# Altium PCB PCB_10 Channel LEDs.PcbDoc
Units mm, origin at the board's own origin, x right, y up, seen from the top; angles counter-clockwise.
Board outline 50.04 x 100.08 mm, 2 copper layers (Top Layer, Bottom Layer); 21 components, 21 nets, 51 pads, 0 vias.
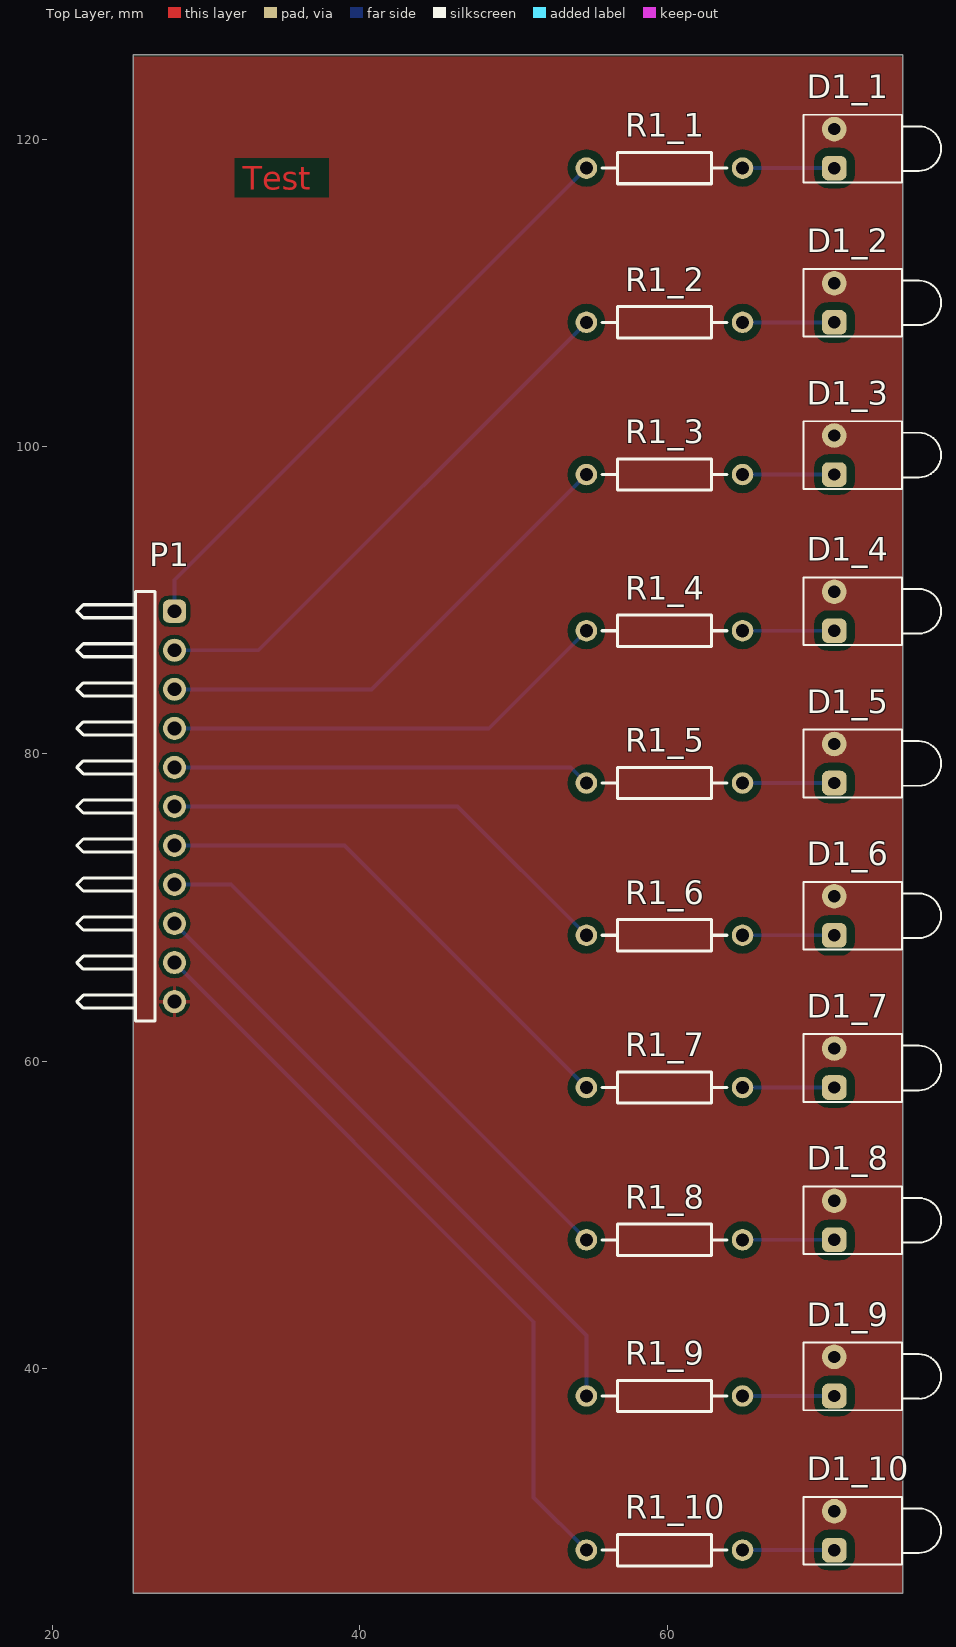
[diagram p0: Top Layer view]
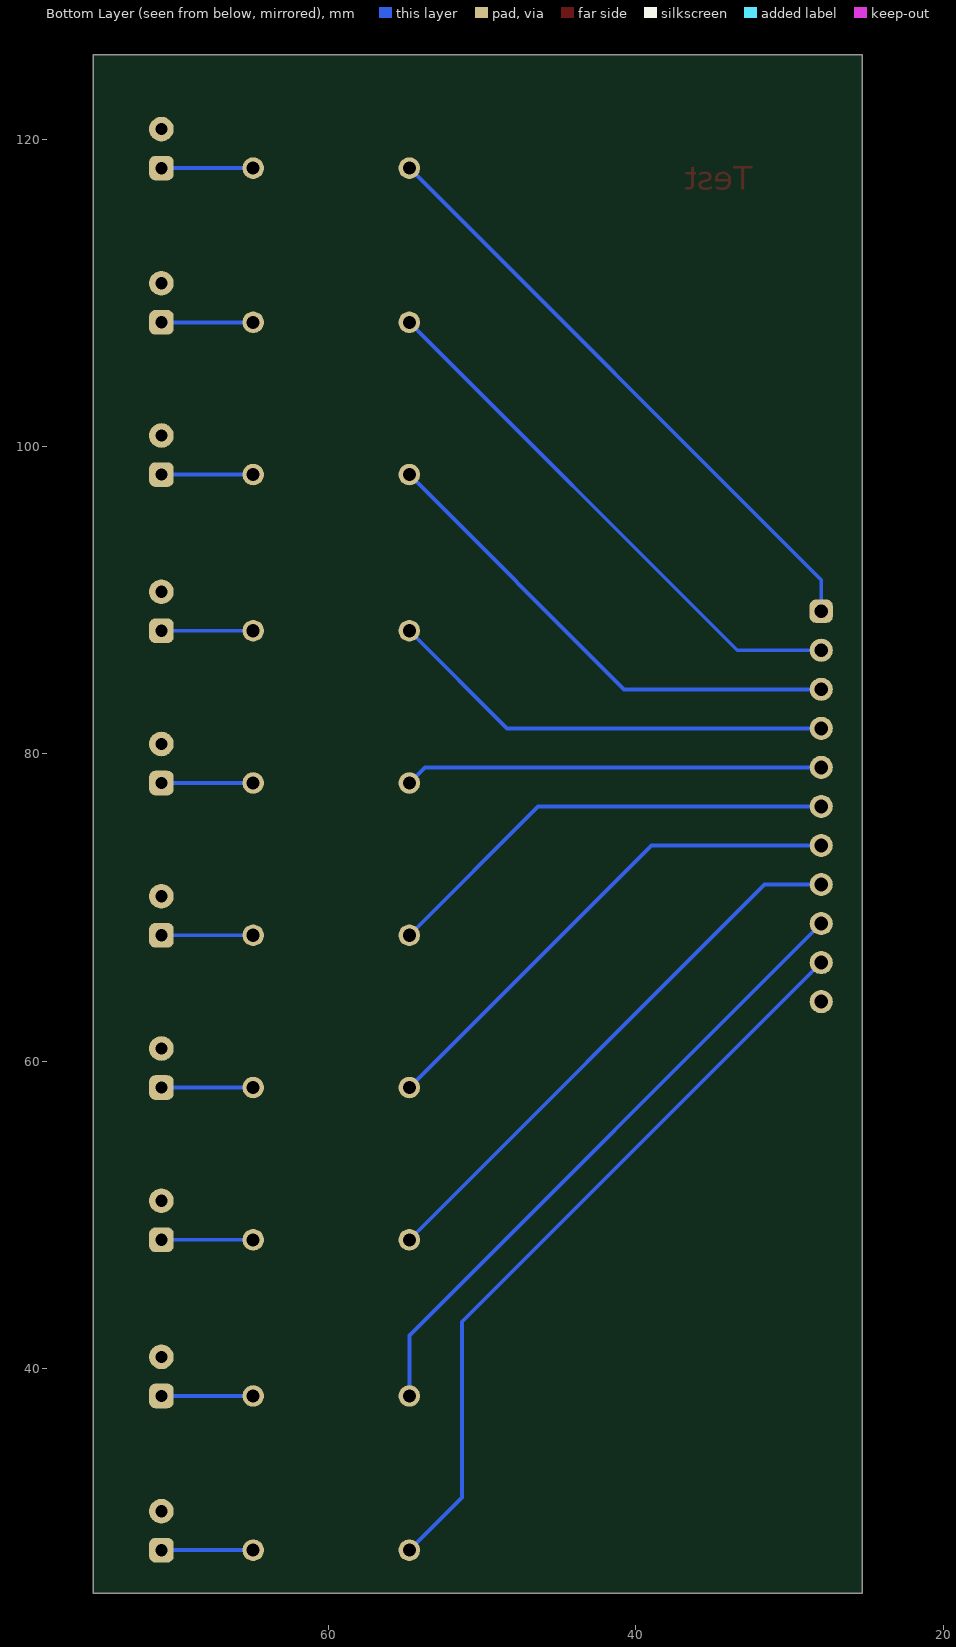
[diagram p1: Bottom Layer view, seen from below]

## Layer stack, top to bottom
Top Solder: solder mask 0.0102, Solder Resist, Dk 3.5
Top Layer: signal copper 0.0356
Dielectric 1: dielectric 0.32, FR-4, Dk 4.8
Bottom Layer: signal copper 0.0356
Bottom Solder: solder mask 0.0102, Solder Resist, Dk 3.5

## Board outline
25.273,25.4 25.273,125.476 75.311,125.476 75.311,25.4

## Design rules (kind name [scope] priority, off if disabled: settings)
Clearance Test [InPoly vs OnLayer('Keep-Out Layer')] p1: gap=2
Clearance "0,5mm to R pads" [InComponentClass('Ballast Rs') vs InNamedPolygon('Top +12V')] p2: gap=0.508
Clearance "0,5mm to LED pad" [InComponentClass('LEDs') vs InNet('+12V')] p3: gap=0.508
Clearance [All] p4: gap=0.254
PolygonConnect "Direct for LEDs" [InComponentClass('LEDs') vs InNet('+12V')] p1: connectstyle=Direct reliefconductorwidth=0.254 reliefentries=4 polygonreliefangle="90 Angle" airgapwidth=0.254
PolygonConnect [All] p2: connectstyle=Relief reliefconductorwidth=0.254 reliefentries=4 polygonreliefangle="90 Angle" airgapwidth=0.254
RoomDefinition Con [InComponentClass('Con')] p1: confinementstyle=ConfineIn formatcopy=TRUE lockcomponents=FALSE outline 20.955,60.452 30.734,60.452 30.734,94.488 20.955,94.488
RoomDefinition Ch10 [InComponentClass('Ch10')] p2: confinementstyle=ConfineIn formatcopy=TRUE lockcomponents=FALSE outline 53.34,26.543 78.486,26.543 78.486,35.306 53.34,35.306
RoomDefinition Ch9 [InComponentClass('Ch9')] p3: confinementstyle=ConfineIn formatcopy=TRUE lockcomponents=FALSE outline 53.34,36.576 78.486,36.576 78.486,45.339 53.34,45.339
RoomDefinition Ch8 [InComponentClass('Ch8')] p4: confinementstyle=ConfineIn formatcopy=TRUE lockcomponents=FALSE outline 53.34,46.736 78.486,46.736 78.486,55.499 53.34,55.499
RoomDefinition Ch7 [InComponentClass('Ch7')] p5: confinementstyle=ConfineIn formatcopy=TRUE lockcomponents=FALSE outline 53.34,56.642 78.486,56.642 78.486,65.405 53.34,65.405
RoomDefinition Ch6 [InComponentClass('Ch6')] p6: confinementstyle=ConfineIn formatcopy=TRUE lockcomponents=FALSE outline 53.34,66.548 78.486,66.548 78.486,75.311 53.34,75.311
RoomDefinition Ch5 [InComponentClass('Ch5')] p7: confinementstyle=ConfineIn formatcopy=TRUE lockcomponents=FALSE outline 53.34,76.454 78.486,76.454 78.486,85.217 53.34,85.217
RoomDefinition Ch4 [InComponentClass('Ch4')] p8: confinementstyle=ConfineIn formatcopy=TRUE lockcomponents=FALSE outline 53.34,86.36 78.486,86.36 78.486,95.123 53.34,95.123
RoomDefinition Ch3 [InComponentClass('Ch3')] p9: confinementstyle=ConfineIn formatcopy=TRUE lockcomponents=FALSE outline 53.34,96.52 78.486,96.52 78.486,105.283 53.34,105.283
RoomDefinition Ch2 [InComponentClass('Ch2')] p10: confinementstyle=ConfineIn formatcopy=TRUE lockcomponents=FALSE outline 53.34,106.426 78.486,106.426 78.486,115.189 53.34,115.189
RoomDefinition Ch1 [InComponentClass('Ch1')] p11: confinementstyle=ConfineIn formatcopy=TRUE lockcomponents=FALSE outline 53.34,116.459 78.486,116.459 78.486,125.222 53.34,125.222
RoutingVias [All] p1: holewidth=0.711 width=1.27 viastyle="Through Hole" minholewidth=0.711 minwidth=1.27 maxholewidth=0.711 maxwidth=1.27
SolderMaskExpansion [All] p1: expansion=0.102
UnpouredPolygon [All] p1: allowunpoured=FALSE
Width [All] p1: maxlimit=0.254 minlimit=0.254 preferedwidth=0.254
29 further rules are at their usual default settings.

## Classes and differential pairs
component class Ch1: D1_1 R1_1
component class Ch2: D1_2 R1_2
component class Ch3: D1_3 R1_3
component class Ch4: D1_4 R1_4
component class Ch5: D1_5 R1_5
component class Ch6: D1_6 R1_6
component class Ch7: D1_7 R1_7
component class Ch8: D1_8 R1_8
component class Ch9: D1_9 R1_9
component class Ch10: D1_10 R1_10
component class Con: P1
net class CAT[1..10]: CAT1 CAT2 CAT3 CAT4 CAT5 CAT6 CAT7 CAT8 CAT9 CAT10
channel class "LED Channels": Ch1 Ch2 Ch3 Ch4 Ch5 Ch6 Ch7 Ch8 Ch9 Ch10

## Components (designator, comment, footprint, x,y, rotation, side; value= is the part's Value field where it differs from the comment)
D1_1 "LED1" LED-1 70.866,119.38 r0 top (schematic designator D1)
D1_2 "LED1" LED-1 70.866,109.347 r0 top (schematic designator D1)
D1_3 "LED1" LED-1 70.866,99.441 r0 top (schematic designator D1)
D1_4 "LED1" LED-1 70.866,89.281 r0 top (schematic designator D1)
D1_5 "LED1" LED-1 70.866,79.375 r0 top (schematic designator D1)
D1_6 "LED1" LED-1 70.866,69.469 r0 top (schematic designator D1)
D1_7 "LED1" LED-1 70.866,59.563 r0 top (schematic designator D1)
D1_8 "LED1" LED-1 70.866,49.657 r0 top (schematic designator D1)
D1_9 "LED1" LED-1 70.866,39.497 r0 top (schematic designator D1)
D1_10 "LED1" LED-1 70.866,29.464 r0 top (schematic designator D1)
P1 "Header 11H" HDR1X11H 27.94,89.281 r270 top
R1_1 "Res2" AXIAL-0.4 59.817,118.11 r0 top (schematic designator R1)
R1_2 "Res2" AXIAL-0.4 59.817,108.077 r0 top (schematic designator R1)
R1_3 "Res2" AXIAL-0.4 59.817,98.171 r0 top (schematic designator R1)
R1_4 "Res2" AXIAL-0.4 59.817,88.011 r0 top (schematic designator R1)
R1_5 "Res2" AXIAL-0.4 59.817,78.105 r0 top (schematic designator R1)
R1_6 "Res2" AXIAL-0.4 59.817,68.199 r0 top (schematic designator R1)
R1_7 "Res2" AXIAL-0.4 59.817,58.293 r0 top (schematic designator R1)
R1_8 "Res2" AXIAL-0.4 59.817,48.387 r0 top (schematic designator R1)
R1_9 "Res2" AXIAL-0.4 59.817,38.227 r0 top (schematic designator R1)
R1_10 "Res2" AXIAL-0.4 59.817,28.194 r0 top (schematic designator R1)

## Footprints (in the part's own frame and the unit in brackets; to place one, negate y for a bottom-side part, rotate by r counter-clockwise, add the part's x,y. Pads: shape width x height; smd on the part's side, far side on the other; paste and mask are expansions set on the pad)
AXIAL-0.4 [mm] "Axial Device, Thru-Hole; 2 Leads; 0.4 in Pin Spacing"
  round 1.4 hole 0.85: 1(-5.08,0) 2(5.08,0)
  silkscreen extent -4.06,-1.02 4.06,1.02, body extent -3.05,-1.02 3.05,1.02, height 2.03
HDR1X11H [mm] "Connector; Header; 11 Position; Right Angle"
  rrect50% 1.5x1.5 hole 0.9: 1(0,0)
  round 1.5 hole 0.9: 2(2.54,0) 3(5.08,0) 4(7.62,0) 5(10.16,0) 6(12.7,0) 7(15.24,0) 8(17.78,0) 9(20.32,0) 10(22.86,0) 11(25.4,0)
  silkscreen extent -1.27,-6.35 26.67,-1.27, body extent -1.27,-2.54 26.67,-1.27, height 3
LED-1 [mm] "LED; 2 Leads"
  round 1.6 hole 0.8: 1(0,1.27)
  rrect50% 1.6x1.6 hole 0.8: 2(0,-1.27)
  silkscreen extent -2,-2.2 6.95,2.2, body extent -2.06,-2.26 7.01,2.26, height 5

## Part data
D1_1 D1_2 D1_3 D1_4 D1_5 D1_6 D1_7 D1_8 D1_9 D1_10: "Typical RED GaAs LED"
P1: "Header, 11-Pin, Right Angle"
R1_1 R1_2 R1_3 R1_4 R1_5 R1_6 R1_7 R1_8 R1_9 R1_10: "Resistor"

## Nets (pads, with @x,y where several pads share a name; then routed paths per layer and width w, separated by ;. In a path a pad name is that pad's centre, name@x,y a point inside that pad or via, vN(x,y) a via of type N, cw(c..) or ccw(c..) an arc to the next point about the centre after c; other vN are vias at no path point)
+12V: D1_1.1 D1_2.1 D1_3.1 D1_4.1 D1_5.1 D1_6.1 D1_7.1 D1_8.1 D1_9.1 D1_10.1 P1.11
CAT1: P1.1 R1_1.1 | length 39.9
  Bottom Layer w0.254: P1.1 27.94,91.313 R1_1.1
CAT2: P1.2 R1_2.1 | length 35.6
  Bottom Layer w0.254: P1.2 33.401,86.741 R1_2.1
CAT3: P1.3 R1_3.1 | length 32.6
  Bottom Layer w0.254: P1.3 40.767,84.201 R1_3.1
CAT4: P1.4 R1_4.1 | length 29.4
  Bottom Layer w0.254: P1.4 48.387,81.661 R1_4.1
CAT5: P1.5 R1_5.1 | length 27.2
  Bottom Layer w0.254: P1.5 53.721,79.121 R1_5.1
CAT6: P1.6 R1_6.1 | length 30.3
  Bottom Layer w0.254: P1.6 46.355,76.581 R1_6.1
CAT7: P1.7 R1_7.1 | length 33.3
  Bottom Layer w0.254: P1.7 38.989,74.041 R1_7.1
CAT8: P1.8 R1_8.1 | length 36.4
  Bottom Layer w0.254: P1.8 31.623,71.501 R1_8.1
CAT9: P1.9 R1_9.1 | length 41.8
  Bottom Layer w0.254: P1.9 54.737,42.164 R1_9.1
CAT10: P1.10 R1_10.1 | length 49.3
  Bottom Layer w0.254: P1.10 51.308,43.053 51.308,31.623 R1_10.1
NetD1_1_2: D1_1.2 R1_1.2 | length 6
  Bottom Layer w0.254: R1_1.2 D1_1.2
NetD1_2_2: D1_2.2 R1_2.2 | length 6
  Bottom Layer w0.254: R1_2.2 D1_2.2
NetD1_3_2: D1_3.2 R1_3.2 | length 6
  Bottom Layer w0.254: R1_3.2 D1_3.2
NetD1_4_2: D1_4.2 R1_4.2 | length 6
  Bottom Layer w0.254: R1_4.2 D1_4.2
NetD1_5_2: D1_5.2 R1_5.2 | length 6
  Bottom Layer w0.254: R1_5.2 D1_5.2
NetD1_6_2: D1_6.2 R1_6.2 | length 6
  Bottom Layer w0.254: R1_6.2 D1_6.2
NetD1_7_2: D1_7.2 R1_7.2 | length 6
  Bottom Layer w0.254: R1_7.2 D1_7.2
NetD1_8_2: D1_8.2 R1_8.2 | length 6
  Bottom Layer w0.254: R1_8.2 D1_8.2
NetD1_9_2: D1_9.2 R1_9.2 | length 6
  Bottom Layer w0.254: R1_9.2 D1_9.2
NetD1_10_2: D1_10.2 R1_10.2 | length 6
  Bottom Layer w0.254: R1_10.2 D1_10.2

## Polygon pours and split planes (outlines as drawn)
+12V on Top Layer "Top +12V" (solid, remove dead copper, pour order 2): 25.272,125.349 75.184,125.349 75.311,125.476 75.311,25.4 25.272,25.4

## Other copper
Top Layer:
  text "Test" at 32.385,116.713 h1.52

## Silkscreen, mask and mechanical layers (free items; w line width, h text height)
Mechanical 1:
  the board outline again, w0.254

## Dimensions
25.273,125.476 to 75.311,125.476 on Mechanical 1
25.273,125.476 to 25.273,25.4 on Mechanical 1